# Altium PCB SRAM_Header.PcbDoc
Units mil, origin at the board's own origin, x right, y up, seen from the top; angles counter-clockwise.
Board outline 6000 x 4000 mil, 2 copper layers (Top Layer, Bottom Layer); 3 components, 34 nets, 188 pads, 0 vias.
Unrouted connection lines stored in the file: 50.
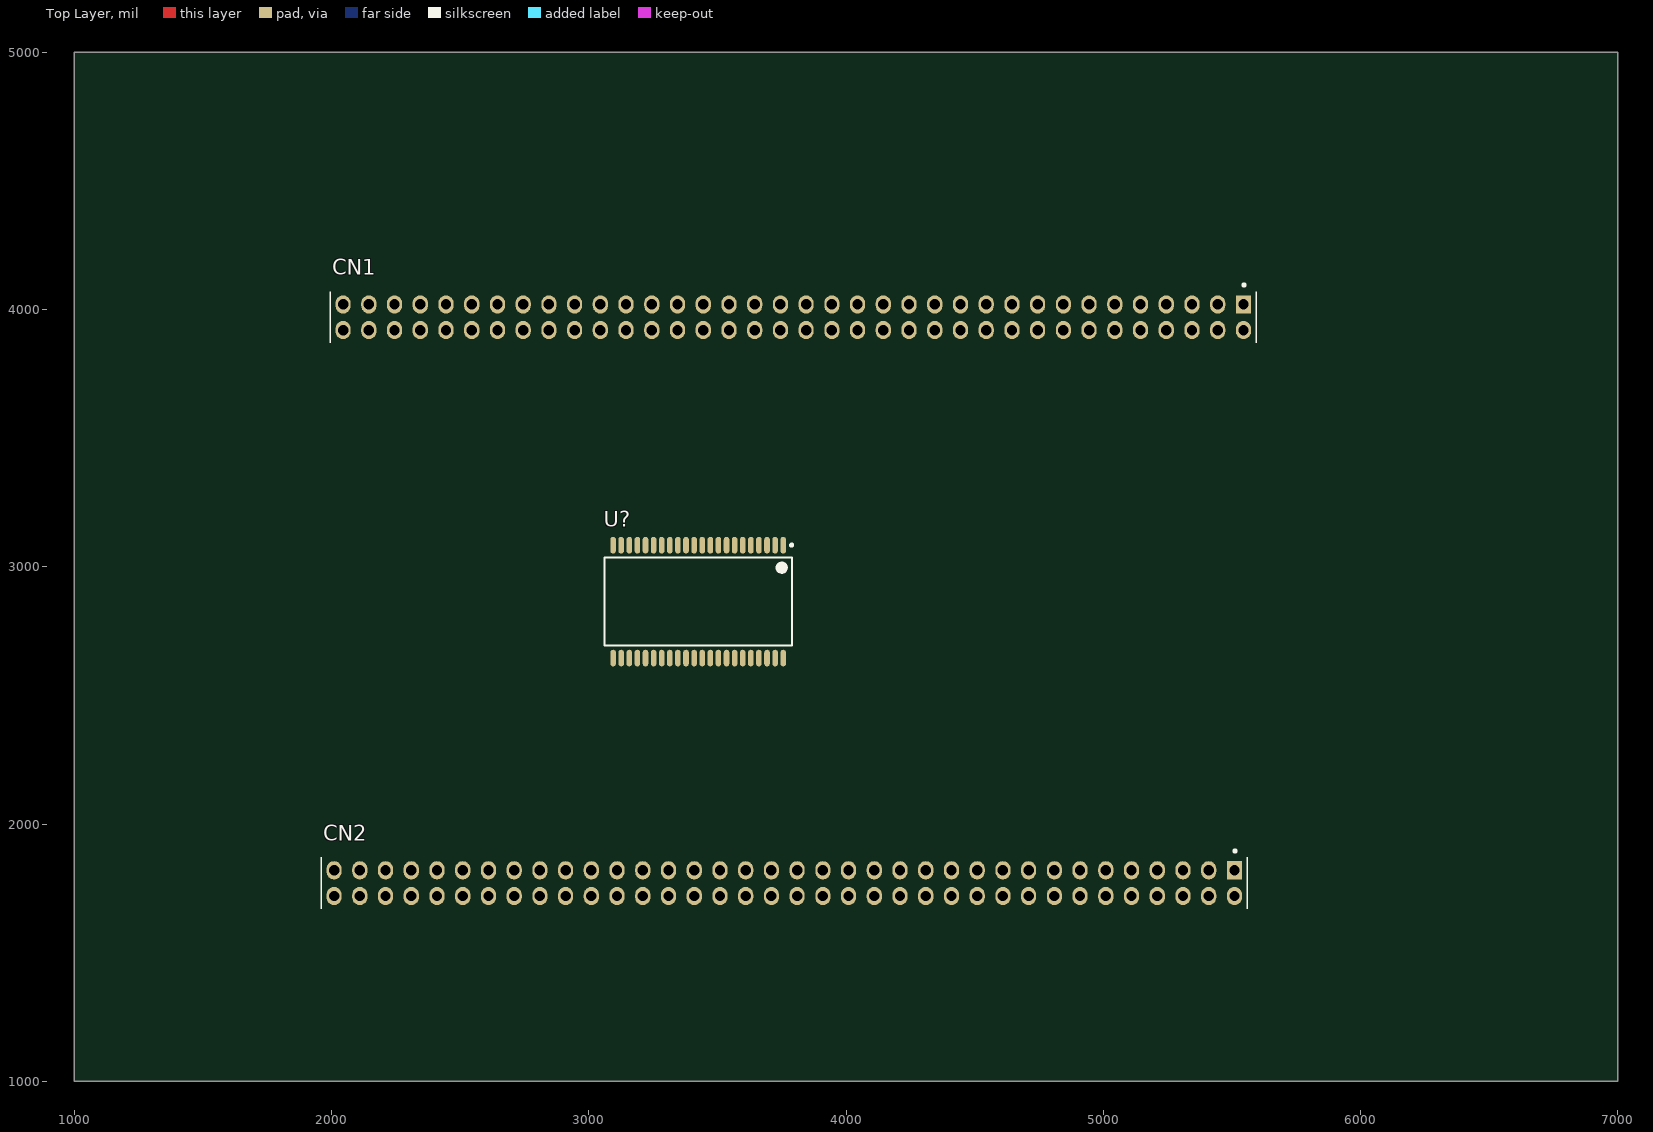
[diagram p0: Top Layer view]
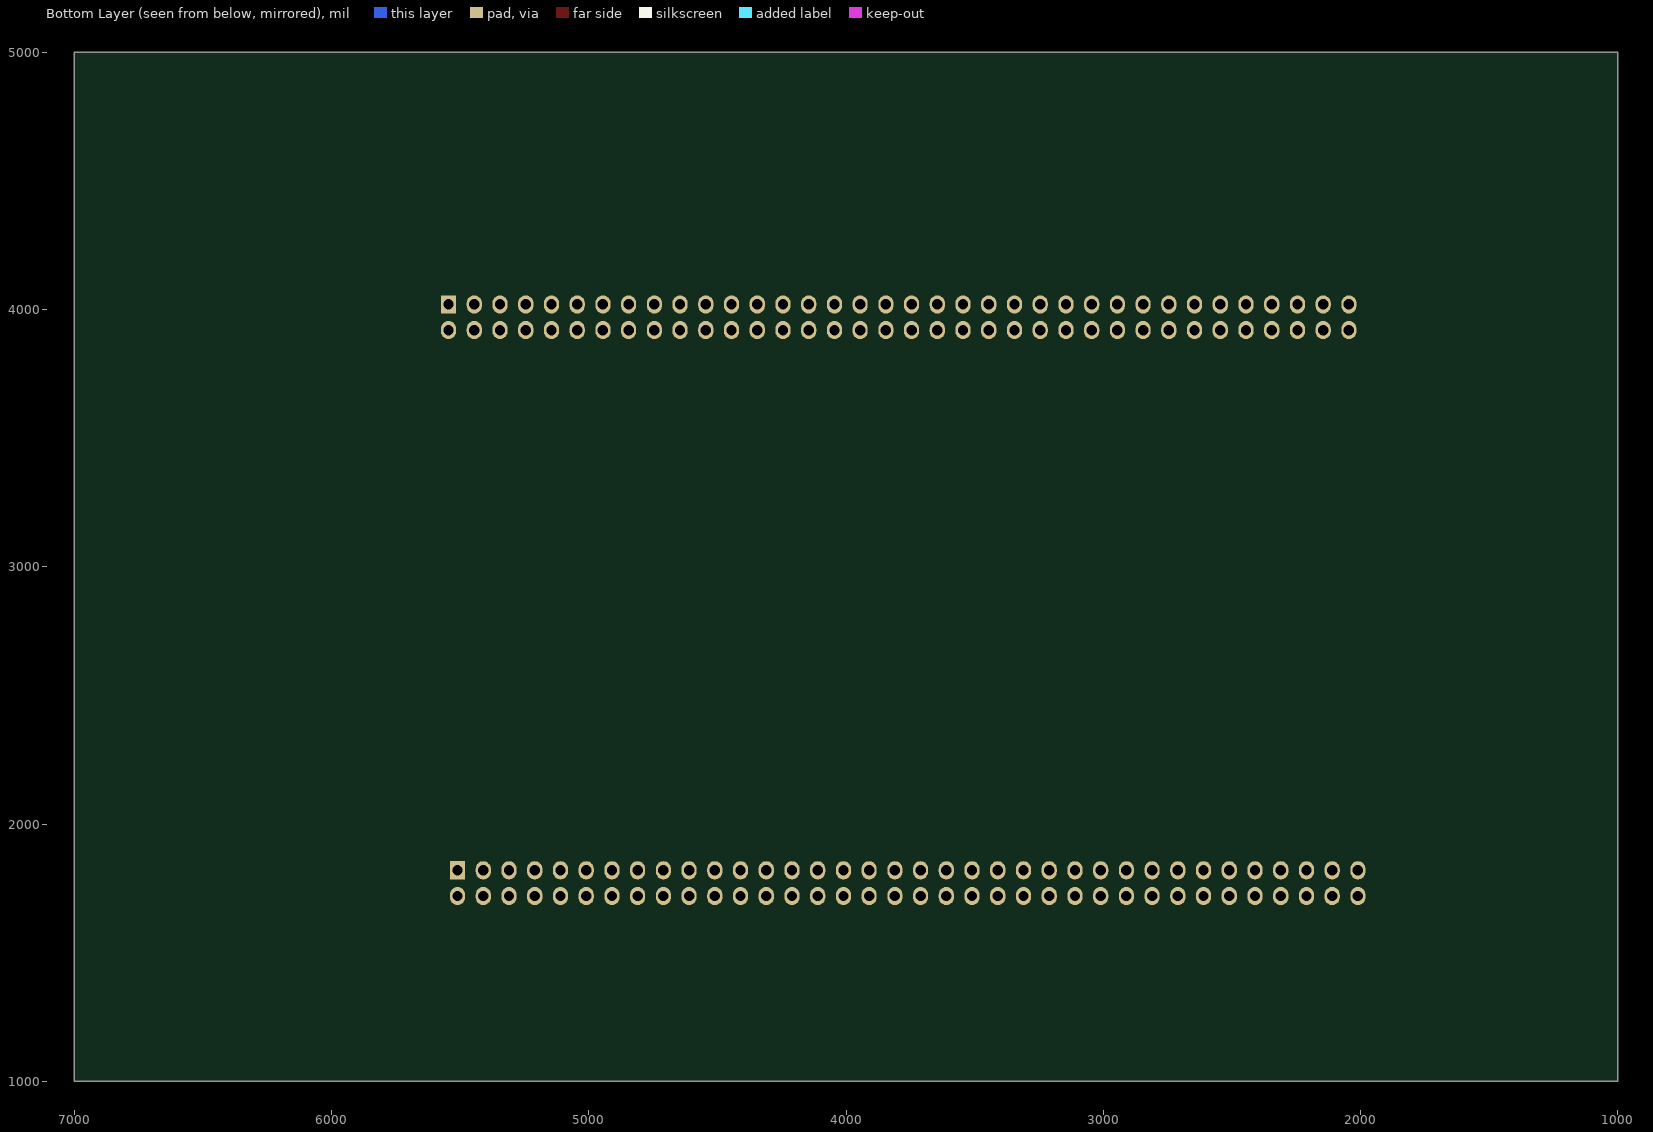
[diagram p1: Bottom Layer view, seen from below]

## Layer stack, top to bottom
Top Solder: solder mask 0.4, Solder Resist, Dk 3.5
Top Layer: signal copper 1.4
Dielectric 1: dielectric 12.6, FR-4, Dk 4.8
Bottom Layer: signal copper 1.4
Bottom Solder: solder mask 0.4, Solder Resist, Dk 3.5

## Board outline
1000,1000 7000,1000 7000,5000 1000,5000

## Design rules (kind name [scope] priority, off if disabled: settings)
Clearance Clearance_1 [All] p1: gap=10 ignorepadtopadclearanceinfootprint=FALSE except(0: Arc-Hole Track-Hole SMDPad-Hole THPad-Hole Via-Hole Fill-Hole Poly-Hole Region-Hole Text-Hole)
Clearance [All] p2: gap=10 ignorepadtopadclearanceinfootprint=FALSE except(0: Arc-Hole Track-Hole SMDPad-Hole THPad-Hole Via-Hole Fill-Hole Poly-Hole Region-Hole Text-Hole)
PolygonConnect [All] p1: connectstyle=Relief reliefconductorwidth=10 reliefentries=4 polygonreliefangle="90 Angle" airgapwidth=10
RoomDefinition SRAM_Adapter [InComponentClass('SRAM_Adapter')] p1: confinementstyle=ConfineIn formatcopy=TRUE lockcomponents=FALSE outline 1000,1010 6985,1010 6985,5000.47 1000,5000.47
RoutingVias [All] p1: holewidth=28 width=50 viastyle="Through Hole" minholewidth=28 minwidth=50 maxholewidth=28 maxwidth=50
SolderMaskExpansion [All] p1: expansion=4
Width [All] p1: maxlimit=10 minlimit=10 preferedwidth=10
30 further rules are at their usual default settings.

## Classes and differential pairs
component class SRAM_Adapter: CN1 CN2

## Components (designator, comment, footprint, x,y, rotation, side; value= is the part's Value field where it differs from the comment)
CN1 "Header 36X2" HDR_2x36_2R54_V_M 5545,4020 r180 top
CN2 "Header 36X2" HDR_2x36_2R54_V_M 5510,1820 r180 top
U? "IS61WV20488BLL-10TLI" ISSI-TSOP-2-44_N 3425.28,2864.49 r270 top

## Footprints (in the part's own frame and the unit in brackets; to place one, negate y for a bottom-side part, rotate by r counter-clockwise, add the part's x,y. Pads: shape width x height; smd on the part's side, far side on the other; paste and mask are expansions set on the pad)
HDR_2x36_2R54_V_M [mm] "Male Header, Pitch 2.54mm, 36x2 Position, Mated Height 6mm, Tail Length 3mm"
  rect 1.5x1.8 hole 1.02: 1(0,0)
  oval 1.5x1.8 hole 1.02: 2(0,2.54) 3(2.54,0) 4(2.54,2.54) 5(5.08,0) 6(5.08,2.54) 7(7.62,0) 8(7.62,2.54) 9(10.16,0) 10(10.16,2.54) 11(12.7,0) 12(12.7,2.54) 13(15.24,0) 14(15.24,2.54) 15(17.78,0) 16(17.78,2.54) 17(20.32,0) 18(20.32,2.54) 19(22.86,0) 20(22.86,2.54) 21(25.4,0) 22(25.4,2.54) 23(27.94,0) 24(27.94,2.54) 25(30.48,0) 26(30.48,2.54) 27(33.02,0) 28(33.02,2.54) 29(35.56,0) 30(35.56,2.54) 31(38.1,0) 32(38.1,2.54) 33(40.64,0) 34(40.64,2.54) 35(43.18,0) 36(43.18,2.54) 37(45.72,0) 38(45.72,2.54) 39(48.26,0) 40(48.26,2.54) 41(50.8,0) 42(50.8,2.54) 43(53.34,0) 44(53.34,2.54) 45(55.88,0) 46(55.88,2.54) 47(58.42,0) 48(58.42,2.54) 49(60.96,0) 50(60.96,2.54) 51(63.5,0) 52(63.5,2.54) 53(66.04,0) 54(66.04,2.54) 55(68.58,0) 56(68.58,2.54) 57(71.12,0) 58(71.12,2.54) 59(73.66,0) 60(73.66,2.54) 61(76.2,0) 62(76.2,2.54) 63(78.74,0) 64(78.74,2.54) 65(81.28,0) 66(81.28,2.54) 67(83.82,0) 68(83.82,2.54) 69(86.36,0) 70(86.36,2.54) 71(88.9,0) 72(88.9,2.54)
  silkscreen extent -1.27,-2.03 90.17,3.81, body extent -1.27,-1.27 90.17,3.81, height 9
ISSI-TSOP-2-44_N [mm] "SOP, 44-Leads, Body 18.5x10.3mm, Pitch 0.8mm, IPC Medium Density"
  oval 1.65x0.55 smd: 1(-5.575,8.4) 2(-5.575,7.6) 3(-5.575,6.8) 4(-5.575,6) 5(-5.575,5.2) 6(-5.575,4.4) 7(-5.575,3.6) 8(-5.575,2.8) 9(-5.575,2) 10(-5.575,1.2) 11(-5.575,0.4) 12(-5.575,-0.4) 13(-5.575,-1.2) 14(-5.575,-2) 15(-5.575,-2.8) 16(-5.575,-3.6) 17(-5.575,-4.4) 18(-5.575,-5.2) 19(-5.575,-6) 20(-5.575,-6.8) 21(-5.575,-7.6) 22(-5.575,-8.4) 23(5.575,-8.4) 24(5.575,-7.6) 25(5.575,-6.8) 26(5.575,-6) 27(5.575,-5.2) 28(5.575,-4.4) 29(5.575,-3.6) 30(5.575,-2.8) 31(5.575,-2) 32(5.575,-1.2) 33(5.575,-0.4) 34(5.575,0.4) 35(5.575,1.2) 36(5.575,2) 37(5.575,2.8) 38(5.575,3.6) 39(5.575,4.4) 40(5.575,5.2) 41(5.575,6) 42(5.575,6.8) 43(5.575,7.6) 44(5.575,8.4)
  silkscreen extent -5.7,-9.25 4.35,9.35, body extent -5.15,-9.25 5.15,9.25, height 1.2

## Part data
CN1 CN2: "Header, 36-Pin, Dual row", Publisher="Altium Limited", Revision="17-Jul-2002: Re-released for DXP Platform."
  CN1: System=Connector
U?: library part CMP-0513-00283-1, "16 M High Speed CMOS SRAM, 2 M x 8, -40 to 85 degC, 44-Pin SOP (TSOP-2-44), Pb-Free", Manufacturer="Integrated Silicon Solution Inc (ISSI)", ComponentLink1Description="Manufacturer URL", ComponentLink1URL=http://www.issi.com/US/index.shtml, ComponentLink2Description=Datasheet, ComponentLink2URL=http://www.issi.com/WW/pdf/61-64WV20488.pdf, ComponentLink3Description="Package Specification", ComponentLink3URL=http://www.issi.com/WW/pdf/61-64WV6416EEBLL.pdf, DatasheetVersion="Rev. B", Mounting Technology="Surface Mount", Organization="2M x 8", PackageDescription="44-Pin 400 mil TSOP-2, Body 18.41 x 10.16 mm, Pitch 0.8 mm", PackageReference=TSOP-2-44, PackageVersion="Rev. F, 06/2008", Packing="Tray / Tube", PartNumber=IS61WV20488BLL-10TLI, RoHS=Pb-Free, Speed (ns)=10

## Nets (pads, with @x,y where several pads share a name; then routed paths per layer and width w, separated by ;. In a path a pad name is that pad's centre, name@x,y a point inside that pad or via, vN(x,y) a via of type N, cw(c..) or ccw(c..) an arc to the next point about the centre after c; other vN are vias at no path point)
+3V3: CN1.16 U?.11 U?.33
GND: CN1.8 CN1.19 CN1.20 CN1.22 CN1.49 CN1.60 CN1.71 CN1.72 CN2.9 CN2.20 CN2.39 CN2.54 CN2.63 CN2.71 CN2.72 U?.12 U?.34
PD0: CN1.57 U?.13
PD1: CN1.55 U?.14
PD4: CN1.39 U?.37
PD5: CN1.41 U?.15
PD7: CN1.45 U?.8
PD11: CN2.45 U?.39
PD12: CN2.43 U?.40
PD13: CN2.41 U?.41
PD14: CN2.46 U?.9
PD15: CN2.48 U?.10
PE3: CN1.47 U?.25
PE4: CN1.48 U?.42
PE7: CN2.44 U?.31
PE8: CN2.40 U?.32
PE9: CN2.52 U?.35
PE10: CN2.47 U?.36
PF0: CN1.53 U?.3
PF1: CN1.51 U?.4
PF2: CN1.52 U?.5
PF3: CN2.58 U?.6
PF4: CN2.38 U?.7
PF5: CN2.36 U?.16
PF12: CN2.59 U?.17
PF13: CN2.57 U?.18
PF14: CN2.50 U?.19
PF15: CN2.60 U?.20
PG0: CN1.59 U?.26
PG1: CN1.58 U?.27
PG2: CN1.42 U?.28
PG3: CN1.44 U?.29
PG4: CN2.69 U?.30
PG5: CN2.68 U?.38
pads on no net: CN1.1 CN1.2 CN1.3 CN1.4 CN1.5 CN1.6 CN1.7 CN1.9 CN1.10 CN1.11 CN1.12 CN1.13 CN1.14 CN1.15 CN1.17 CN1.18 CN1.21 CN1.23 CN1.24 CN1.25 CN1.26 CN1.27 CN1.28 CN1.29 CN1.30 CN1.31 CN1.32 CN1.33 CN1.34 CN1.35 CN1.36 CN1.37 CN1.38 CN1.40 CN1.43 CN1.46 CN1.50 CN1.54 CN1.56 CN1.61 CN1.62 CN1.63 CN1.64 CN1.65 CN1.66 CN1.67 CN1.68 CN1.69 CN1.70 CN2.1 CN2.2 CN2.3 CN2.4 CN2.5 CN2.6 CN2.7 CN2.8 CN2.10 CN2.11 CN2.12 CN2.13 CN2.14 CN2.15 CN2.16 CN2.17 CN2.18 CN2.19 CN2.21 CN2.22 CN2.23 CN2.24 CN2.25 CN2.26 CN2.27 CN2.28 CN2.29 CN2.30 CN2.31 CN2.32 CN2.33 CN2.34 CN2.35 CN2.37 CN2.42 CN2.49 CN2.51 CN2.53 CN2.55 CN2.56 CN2.61 CN2.62 CN2.64 CN2.65 CN2.66 CN2.67 CN2.70 U?.1 U?.2 U?.21 U?.22 U?.23 U?.24 U?.43 U?.44